# Altium PCB switch_routed.PcbDoc
Units mil, origin at the board's own origin, x right, y up, seen from the top; angles counter-clockwise.
Board outline 1500 x 1500 mil, 2 copper layers (Top Layer, Bottom Layer); 12 components, 9 nets, 31 pads, 0 vias.
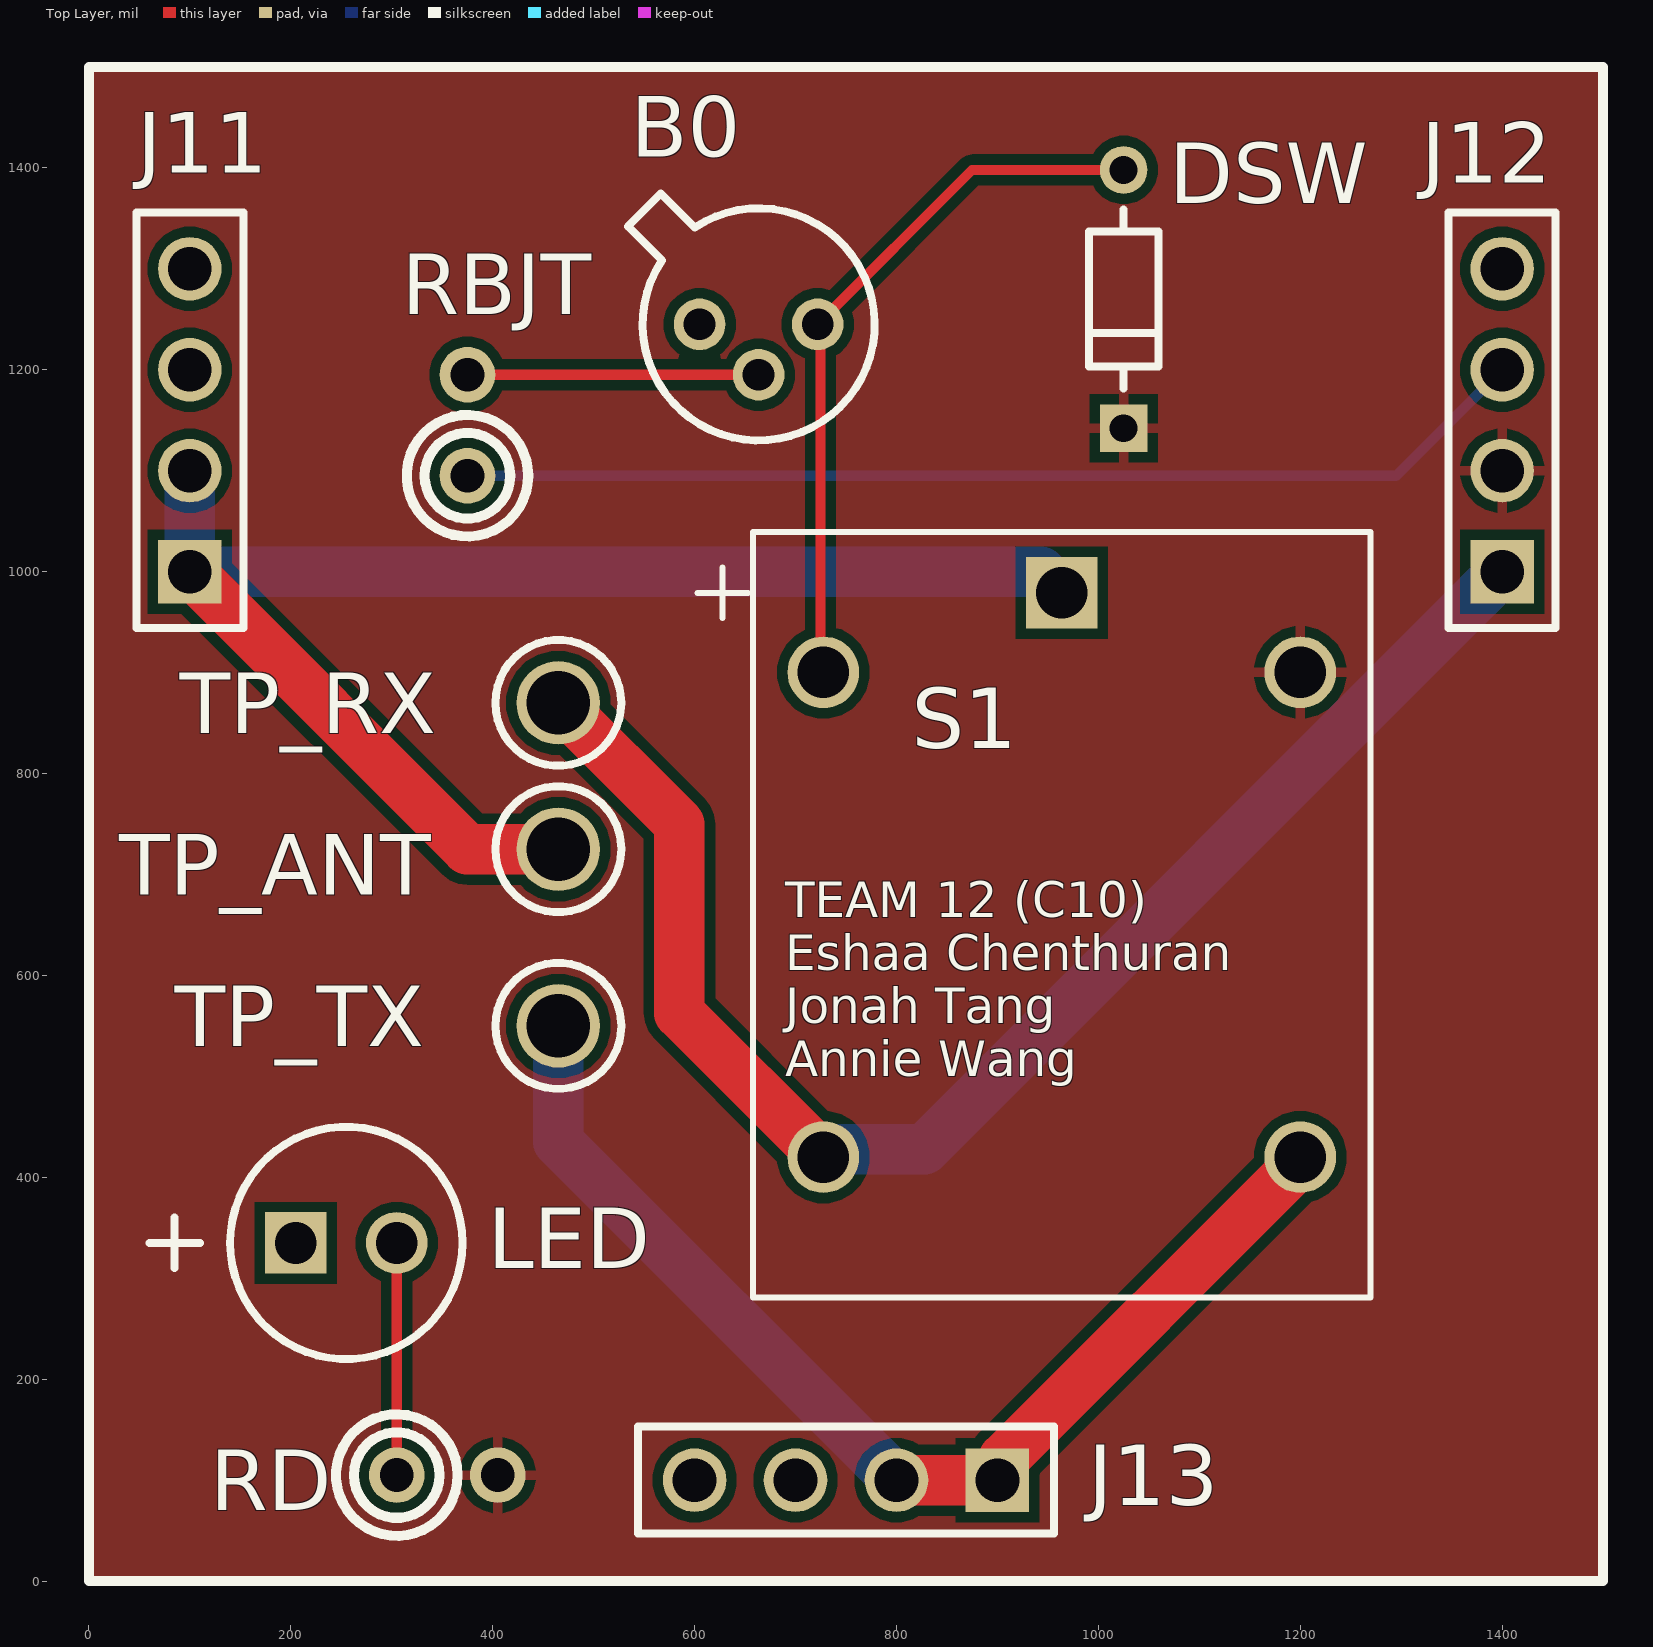
[diagram p0: Top Layer view]
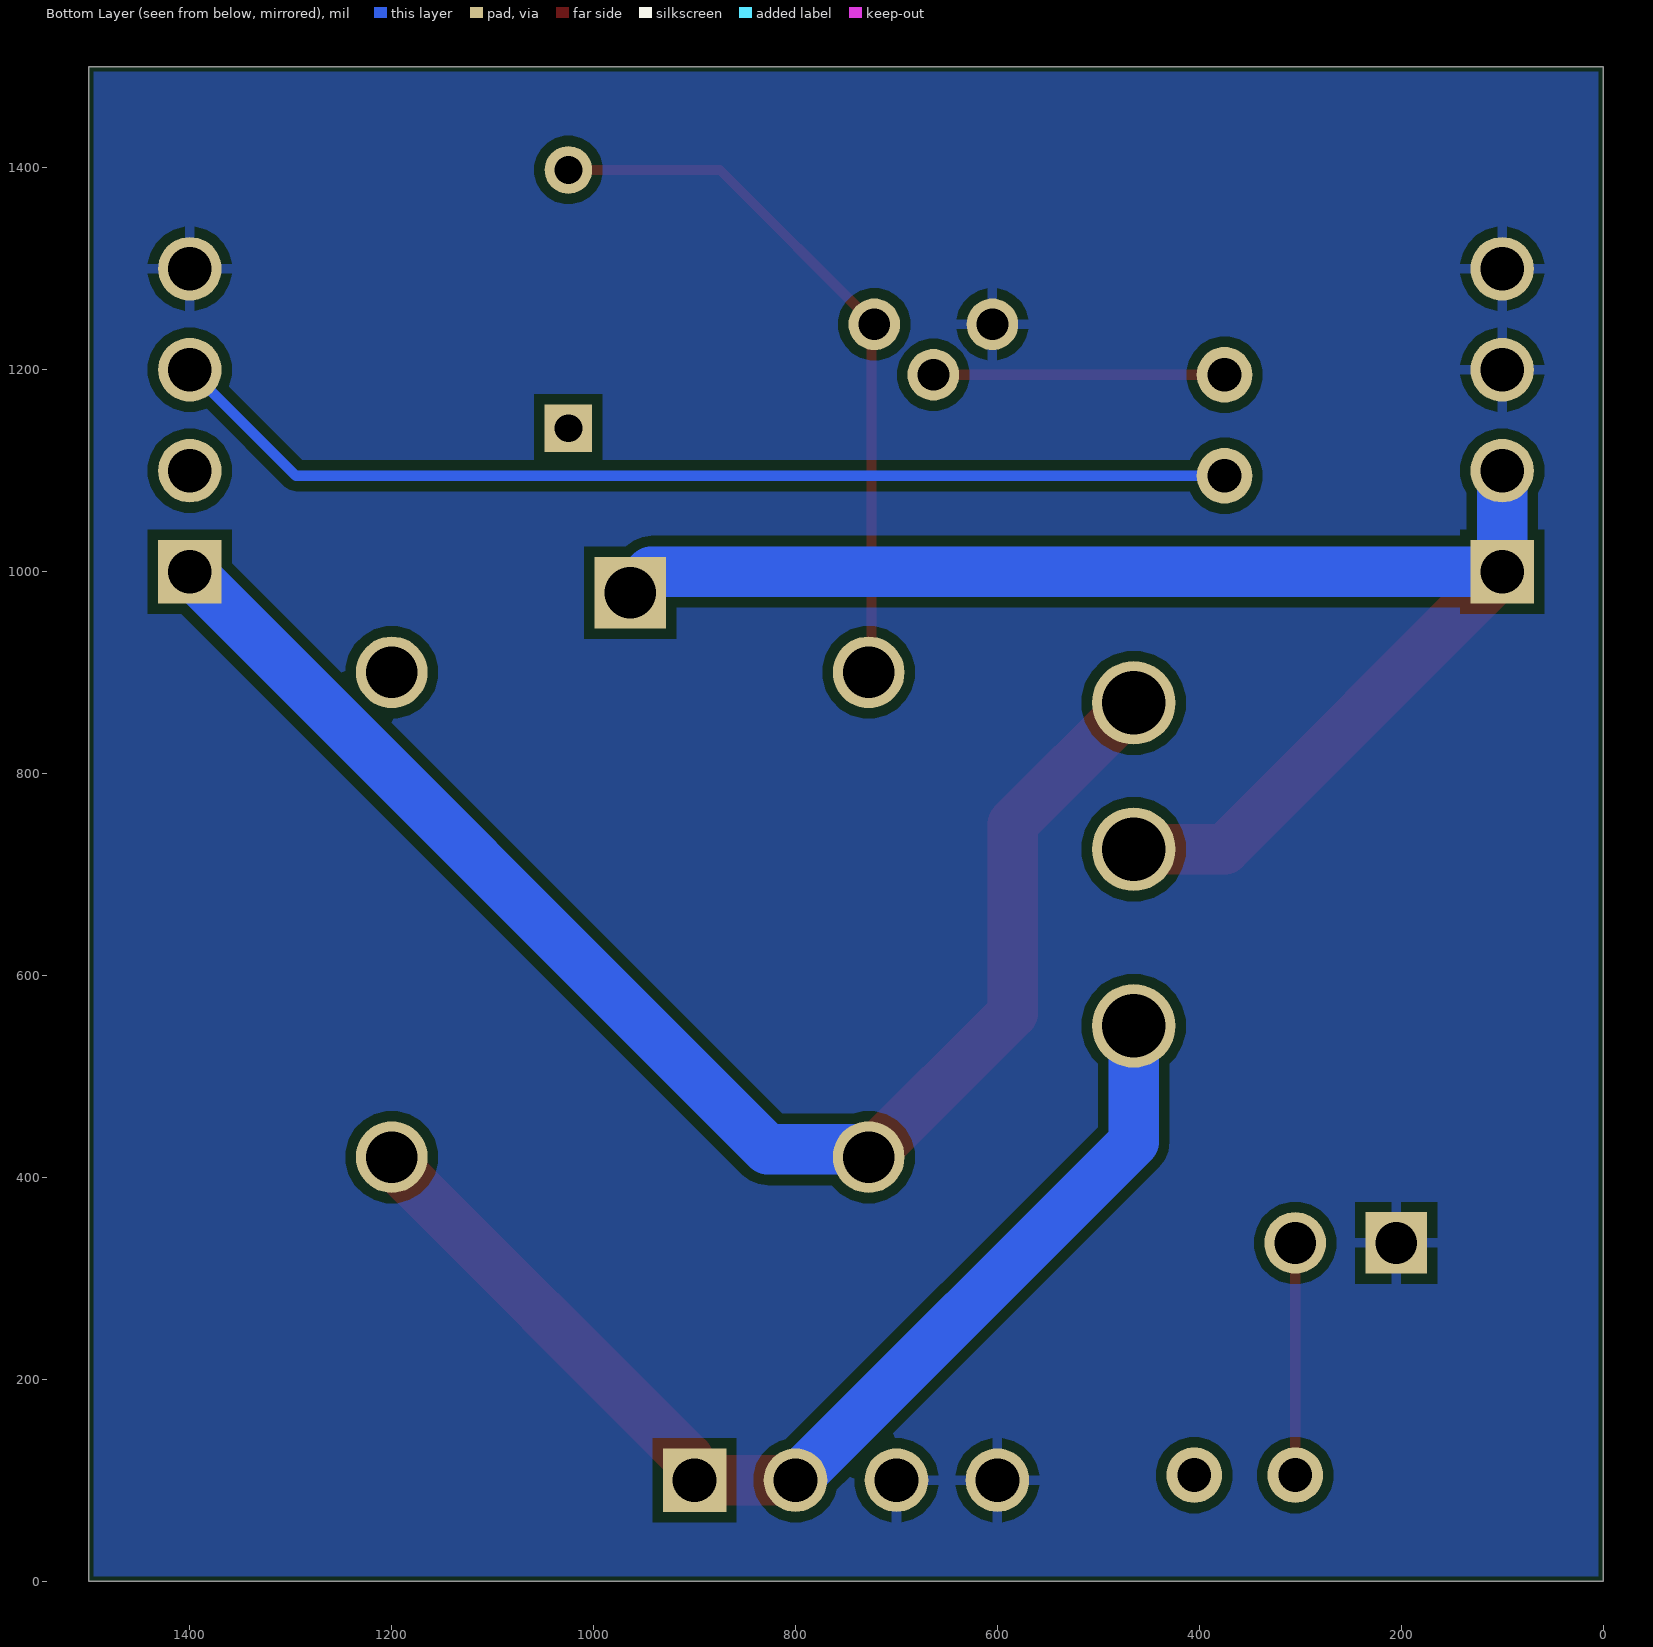
[diagram p1: Bottom Layer view, seen from below]

## Layer stack, top to bottom
Top Solder: solder mask 0.4, Solder Resist, Dk 3.5
Top Layer: signal copper 1.4
Dielectric 1: dielectric 12.6, FR-4, Dk 4.8
Bottom Layer: signal copper 1.4
Bottom Solder: solder mask 0.4, Solder Resist, Dk 3.5

## Board outline
0,0 0,1500 1500,1500 1500,0

## Design rules (kind name [scope] priority, off if disabled: settings)
Clearance [All] p1: gap=10 ignorepadtopadclearanceinfootprint=FALSE except(0: Arc-Hole Track-Hole SMDPad-Hole THPad-Hole Via-Hole Fill-Hole Poly-Hole Region-Hole Text-Hole)
PolygonConnect [All] p1: connectstyle=Relief reliefconductorwidth=10 reliefentries=4 polygonreliefangle="90 Angle" airgapwidth=10
RoutingVias [All] p1: holewidth=28 width=50 viastyle="Through Hole" minholewidth=28 minwidth=50 maxholewidth=28 maxwidth=50
SolderMaskExpansion [All] p1: expansion=4 istentingtop=FALSE
Width [All] p1: maxlimit=50 minlimit=10 preferedwidth=10
30 further rules are at their usual default settings.

## Components (designator, comment, footprint, x,y, rotation, side; value= is the part's Value field where it differs from the comment)
B0 "2N2222" MLTC-TO-18-3 663.46,1245 r0 top
DSW "1N4148TR" FP-6_560-5004_12-4-MFG 1025,1270 r90 top
J11 "ANT" 61300411121 100,1150 r90 top
J12 "RX" 61300411121 1400,1150 r90 top
J13 "TX" 61300411121 750,100 r180 top
LED "HLMP-3301" AVAG-HLMP-3301-2 205,335 r0 top
RBJT "Res1" AXIAL-0.1-RES 375,1145 r90 top value=470
RD "Res1" AXIAL-0.1-RES 355,105 r0 top value=1K
S1 "AZ943-1CH-5DE" K_AZ943-1C_AMZ 963.78,979.02 r0 top
TP_ANT "5010" KSTN-5010_V 465,725 r90 top
TP_RX "5011" KSTN-5011_V 465,870 r90 top
TP_TX "5011" KSTN-5011_V 465,550 r90 top

## Footprints (in the part's own frame and the unit in brackets; to place one, negate y for a bottom-side part, rotate by r counter-clockwise, add the part's x,y. Pads: shape width x height; smd on the part's side, far side on the other; paste and mask are expansions set on the pad)
61300411121 [mm] "Pin Header, pitch 2.54 mm, THT, Vertical, single row, 4p"
  rect 1.6x1.6 hole 1.1: 1(-3.81,0)
  round 1.6 hole 1.1: 2(-1.27,0) 3(1.27,0) 4(3.81,0)
  silkscreen extent -5.23,-1.35 5.23,1.35, body extent -5.08,-1.27 5.08,1.27, height 8.57
AVAG-HLMP-3301-2 [mm] "THD, 2-Leads, Body Dia 5.85mm"
  rect 1.55x1.55 hole 1.05: 1(0,0)
  round 1.55 hole 1.05: 2(2.54,0)
  silkscreen extent -3.68,-2.92 4.19,2.92
AXIAL-0.1-RES [mm] "Axial Device, Thru-Hole; 2 Leads; 0.3 in Pin Spacing"
  round 1.4 hole 0.85: 1(-1.27,0) 2(1.27,0)
  silkscreen extent -2.8,-1.53 0.26,1.53
FP-6_560-5004_12-4-MFG [mm]
  rect 1.2x1.2 hole 0.7 paste-1000 mask+0: 1(-3.25,0)
  round 1.2 hole 0.7 paste-1000 mask+0: 2(3.25,0)
  silkscreen extent -2.25,-0.87 2.25,0.87, body extent -3.95,-0.97 3.95,0.97, height 0.25
K_AZ943-1C_AMZ [mil]
  rect 71x71 / inner round 60 / far side rect 71x71 hole 51 paste-35.5 mask+0: 1(0,0)
  round 71 / inner round 60 / far side round 71 hole 51 paste-35.5 mask+0: 2(-236.22,-78.74) 3(-236.22,-559.02) 4(236.22,-559.02) 5(236.22,-78.74)
  silkscreen extent -361,-698 306,60
KSTN-5010_V [mm] "Test Point, Dia 3.17mm"
  round 2.1 hole 1.6: 1(0,0)
  silkscreen extent -1.58,-1.59 1.58,1.59, body extent -1.59,-1.59 1.59,1.59, height 8.13
KSTN-5011_V [mm] "Test Point, Dia 3.17mm"
  round 2.1 hole 1.6: 1(0,0)
  silkscreen extent -1.58,-1.59 1.58,1.59, body extent -1.59,-1.59 1.59,1.59, height 8.13
MLTC-TO-18-3 [mm] "TO-18, 3-Leads"
  round 1.3 hole 0.8: 1(-1.485,0) 2(0,-1.27) 3(1.485,0)
  silkscreen extent -3.29,-2.92 2.92,3.29, body extent -3.29,-2.93 2.93,3.29, height 5.33

## Part data
B0: library part CMP-2000-05237-1, "Low Power Bipolar NPN Transistor, 30 V, -65 to 200 degC, 3-Pin TO-18, RoHS, Bulk", Collector Emitter Voltage V(br)ceo=30V, Collector Emitter Voltage Vces=400mV, Continuous Collector Current Ic Max=800mA, Current Ic @ Vce Sat=150mA, DC Current Gain hFE=100, Full Power Rating Temperature=25degC, Manufacturer=Multicomp, Package / Case=TO-18, Package Description="3-Pin Transistor Outline Package (TO-18), Dia 5.54 mm, Pitch Pitch 1.485mm", Package Reference=TO-18-3, Power Dissipation Pd=500mW, Voltage Vcbo=60V, Current Ic Continuous a Max=800mA, Current Ic hFE=150mA, Datasheet URL=http://www.farnell.com/datasheets/1662272.pdf, Datasheet Version="Rev. 1.1, 05/2012", DC Collector Current=800mA, Gain Bandwidth ft Min=250MHz, Gain Bandwidth ft Typ=250MHz, Hfe Min=100, Manufacturer URL=http://uk.farnell.com/b/multicomp, No. of Pins=3, No. of Transistors=1, Pin Configuration=a, Power Dissipation Ptot Max=500mW, SVHC=NoSVHC(19-Dec-2012), Transistor Case Style=TO-18, Transistor Polarity=NPN
DSW: library part CMP-02540-000029-2, "DIODE GEN PURP 75V 300MA DO35", Current Rating=150A, Forward Current=300mA, Forward Voltage=1V, Max Operating Temperature=175°C, Max Repetitive Reverse Voltage (Vrrm)=100V, Min Operating Temperature=-65°C, Peak Non-Repetitive Surge Current=2A, Power Dissipation=440mW, Element Configuration=Single, Lead Free="Lead Free", Mount="Through Hole", Number of Pins=2, Packaging="Tape and Reel", Reverse Recovery Time=8ns
J11 J12 J13: library part CMP-1502-01064-1, "THT Vertical Pin Header WR-PHD, Pitch 2.54 mm, Single Row, 4 pins", Contact Resistance=20mOhm, Manufacturer="Wurth Elektronik", Operating Temperature=-40to105degC, Package Reference=61300411121, Rated Current=3A, Withstanding Voltage=500VAC, Working Voltage=250VAC, Datasheet URL=https://katalog.we-online.de/em/datasheet/6130xx11121.pdf, Gender=Male, Manufacturer URL=http://www.we-online.de, Mounting Technology=THT, Orientation=Vertical, Packaging=Bag, Part Number=61300411121, Pin Number=4, Pitch=2.54mm, Publisher=WurthElektronik, Row Number=Single
LED: library part CMP-2000-06411-1, "T-1 3/4 (5 mm) Diffused LED Lamp, 1.9 V, -40 to 100 degC, 2-Pin THD, RoHS, Bulk", Emitting Color=Red, Forward Current=25mA, Forward Voltage=2.4V, Manufacturer=Avago, Operating Temp Range=-40Cto100C, Operating Temperature Classification=Industrial, Package Description="2-Pin Through Hole LED, Dia 5.85 mm", Package Type=T-13/4, Power Dissipation=85W, Reverse Voltage=5V, Test Current (It)=10mA, Chip Material=GaP, Datasheet URL=http://www.avagotech.com/docs/AV02-1558EN, Datasheet Version=03/2015, DELETED=Compliant, Dominant Wave Length=626nm, High Brightness=No, Lens Dimensions=5.08x5.08x8.3mm, Lens Type=ColoredDiffused, Lum Intensity=5.4mcd, Luminous Intensity=5.4mcd, Main Category=StandardLED, Manufacturer URL=http://www.avagotech.com/, Mounting=ThroughHole, Mounting Technology=ThroughHole, Number of  Elements=1, Package Reference=HLMP-3301, Packaging=TapeandReel, Peak Wavelength=635nm, Pin Count=2, Product Depth (mm)=6.1mm, Product Height (mm)=9.19mm, Product Length (mm)=6.1mm, Rad Hardened=No, Shape Type=Circular, Type=Uni-Color, Viewing Angle=60deg
RBJT: library part "RES 470 OHM 5% 1/4W AXIAL", "Resistor", Manufacturer Part Number=CFR-25JB-52-470R, Power Rating=1/4W, Tolerance=0.05, LatestRevisionDate=17-Jul-2002, LatestRevisionNote="Re-released for DXP Platform.", Published=8-Jun-2000, Publisher="Altium Limited"
RD: library part "RES 1K OHM 5% 1/4W AXIAL", "Resistor", Manufacturer Part Number=CFR-25JB-52-1K, Power Rating=1/4W, Tolerance=0.05, LatestRevisionDate=17-Jul-2002, LatestRevisionNote="Re-released for DXP Platform.", Published=8-Jun-2000, Publisher="Altium Limited"
S1: "No Description Available", Mfr_Name="American Zettler", RefDes=RefDes, Type="Power Relays"
TP_ANT: library part CMP-1672-00002-4, "Test Point, Red, Through Hole, RoHS, Bulk", Colour=Red, Manufacturer=Keystone, Package Quantity=100, ComponentLink1Description="Manufacturer URL", ComponentLink1URL=http://www.keyelco.com/, ComponentLink2Description=Datasheet, ComponentLink2URL=http://www.keyelco.com/product-pdf.cfm?p=1319, Contact Material=Bronze, Contact Plating=Silver, DatasheetVersion="Rev. F, 12/2013", Height="8.12 mm", Mount="Through Hole", Mounting Technology="Through Hole", PackageDescription="1-Pin Through Hole Device, Dia 3.17 mm", PackageReference=5010, Packaging=Bulk, Pins=1, REACH SVHC="No SVHC", RoHSCompliant=true
TP_RX TP_TX: library part CMP-1672-00003-4, "Test Point, Black, Through Hole, RoHS, Bulk", Colour=Black, Manufacturer=Keystone, Package Quantity=100, ComponentLink1Description="Manufacturer URL", ComponentLink1URL=http://www.keyelco.com/, ComponentLink2Description=Datasheet, ComponentLink2URL=http://www.keyelco.com/product-pdf.cfm?p=1320, Contact Material=Bronze, Contact Plating=Silver, DatasheetVersion="Rev. F, 12/2013", Height="8.12 mm", Mount="Through Hole", Mounting Technology="Through Hole", PackageDescription="1-Pin Through Hole Device, Dia 3.17 mm", PackageReference=5011, Packaging=Bulk, Pins=1, REACH SVHC="No SVHC", RoHSCompliant=true

## Nets (pads, with @x,y where several pads share a name; then routed paths per layer and width w, separated by ;. In a path a pad name is that pad's centre, name@x,y a point inside that pad or via, vN(x,y) a via of type N, cw(c..) or ccw(c..) an arc to the next point about the centre after c; other vN are vias at no path point)
+5V: DSW.1 J12.2 RD.2 S1.5 | length 0.3
  Top Layer w10: S1.5 S1.5@1200.14,900.28 ; J12.2@1399.86,1100 J12.2
/TXEN: J12.3 RBJT.1 | length 1068.5
  Bottom Layer w10: RBJT.1 1295,1095 J12.3
ANT: J11.1 J11.2 S1.1 TP_ANT.1 | length 1451.4
  Top Layer w50: J11.1 375,725 TP_ANT.1
  Bottom Layer w50: J11.2 J11.1 942.8,1000 S1.1
GND: B0.1 J11.3 J11.4 J12.4 J13.3 J13.4 LED.1 | length 7.1
  Top Layer w10: J13.4 J13.4@602.5,102.5 ; B0.1@602.5,1242.5 B0.1
NetB0_2: B0.2 RBJT.2 | length 288.5
  Top Layer w10: RBJT.2 B0.2
NetB0_3: B0.3 DSW.2 S1.2 | length 713.5
  Top Layer w10: S1.2 724.74,903.1 724.74,1242.18 B0.3 874.88,1397.95 DSW.2
NetLED_2: LED.2 RD.1 | length 230
  Top Layer w10: RD.1 LED.2
PA_OUT: J13.1 J13.2 S1.4 TP_TX.1 | length 1133
  Top Layer w50: J13.2 J13.1 906.5,106.5 906.5,121.5 1200,415 S1.4
  Bottom Layer w50: TP_TX.1 465,435 J13.2
RX_SIG: J12.1 S1.3 TP_RX.1 | length 1460.7
  Top Layer w50: TP_RX.1 585,750 585,562.56 S1.3
  Bottom Layer w50: S1.3@735.13,427.57 827.57,427.57 J12.1

## Polygon pours and split planes (outlines as drawn)
GND on Bottom Layer "GND" (solid, pour order 0): 5,1495 1495,1495 1495,5 5,5
+5V on Top Layer "+5V" (solid, pour order 1): 5,1495 1495,1495 1495,5 5,5

## Silkscreen, mask and mechanical layers (free items; w line width, h text height)
Top Overlay:
  the board outline again, w10
  text "TEAM 12 (C10) / Eshaa Chenthuran / Jonah Tang / Annie Wang" at 690,500 h35
Board Shape:
  lines w10: 0,0 0,1500 1500,1500 1500,0 0,0
  lines w47.24: 0,0 1500,0 1500,1500 0,1500 0,0